# Altium PCB ESP32-PoE_Rev_G1.PcbDoc (part 1 of 3)
Units mm, origin at the board's own origin, x right, y up, seen from the top; angles counter-clockwise.
Board outline 28 x 75 mm, 2 copper layers (F.Cu, B.Cu); 132 components, 123 nets, 484 pads, 212 vias.
Unrouted connection lines stored in the file: 2.
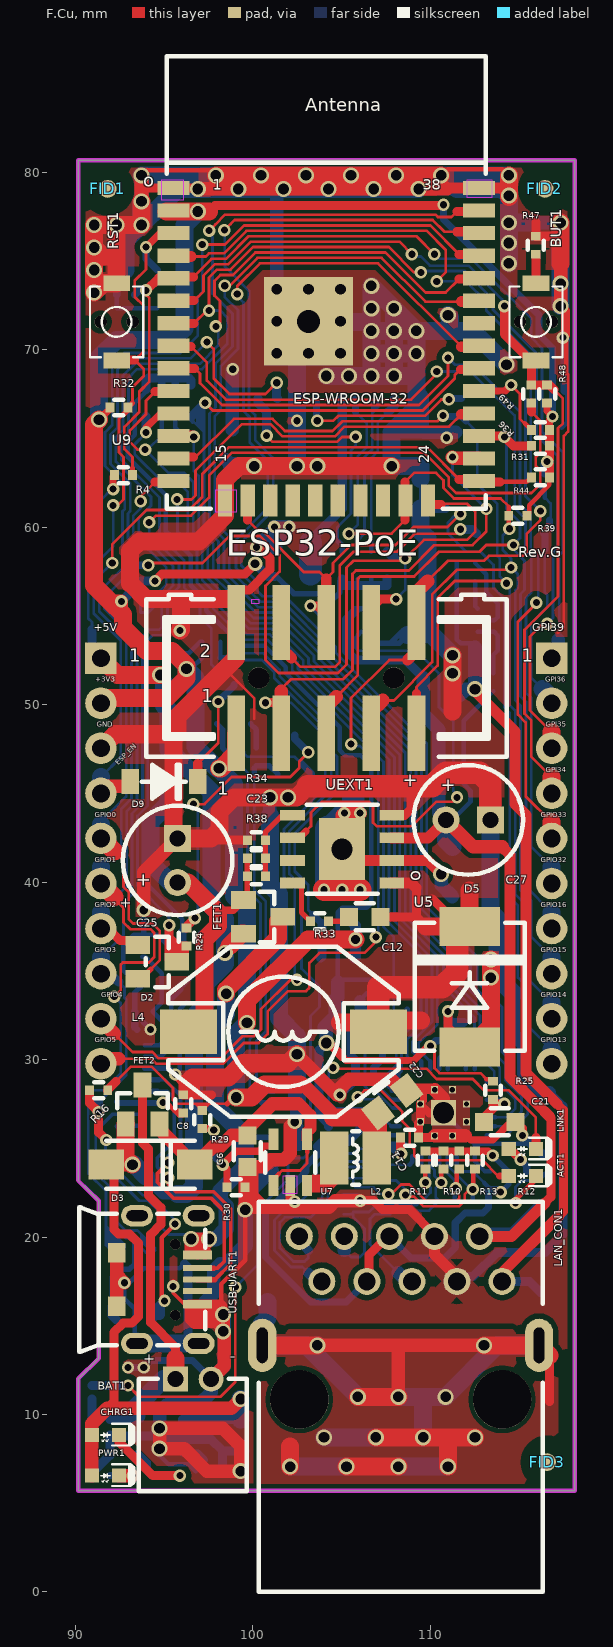
[diagram p0: F.Cu view]
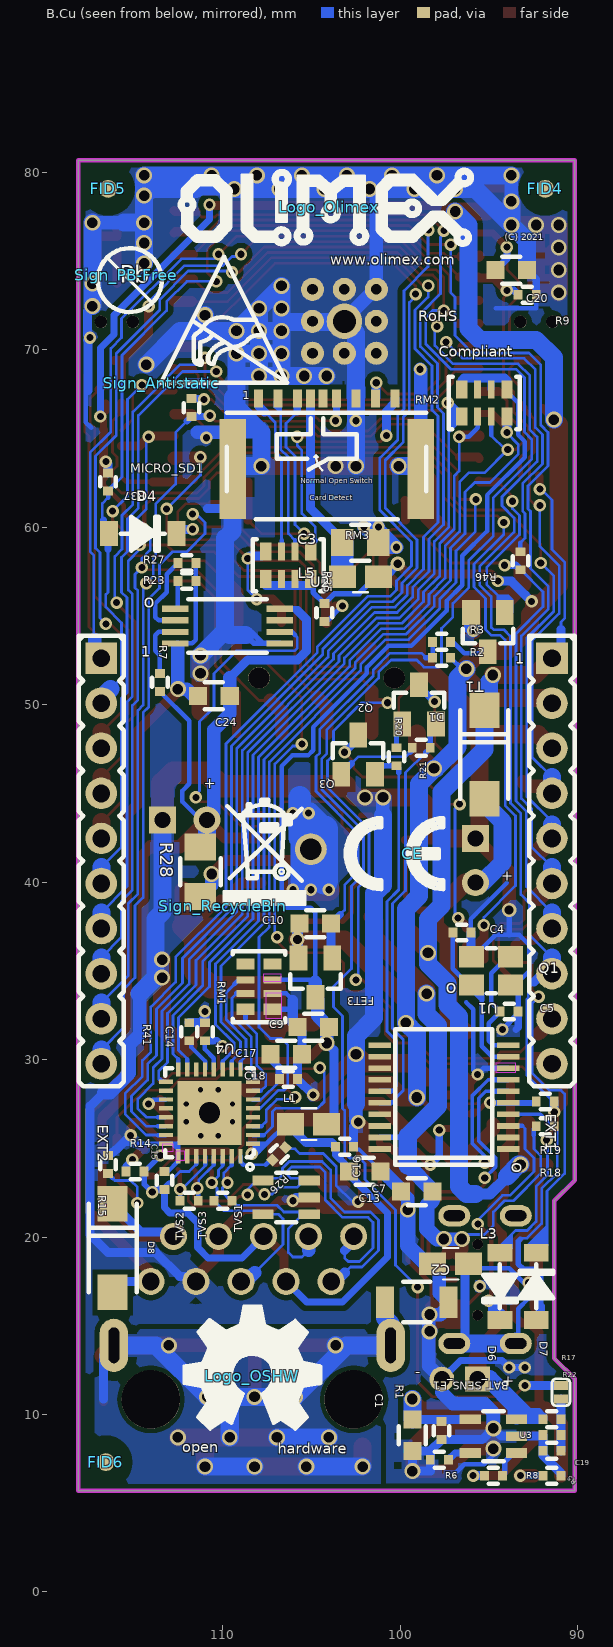
[diagram p1: B.Cu view, seen from below]

## Layer stack, top to bottom
F.Mask: solder mask 0.0102, Solder Resist, Dk 3.5
F.Cu: signal copper 0.0356
Dielectric 1: dielectric 0.32, FR-4, Dk 4.8
B.Cu: signal copper 0.0356
B.Mask: solder mask 0.0102, Solder Resist, Dk 3.5

## Board outline
118.15,80.696 90.15,80.696 90.15,23.192 91.313,22.049 91.313,13.159 90.15,12.016 90.15,5.696 118.15,5.696 118.15,80.696

## Design rules (kind name [scope] priority, off if disabled: settings)
Clearance "Clearence 1,016_PadClass" [InPadClass('Pad Class Clearance 1,016')] p1: gap=1.016 ignorepadtopadclearanceinfootprint=FALSE
Clearance "Clearence 0,3048_Polygon" [InNamedPolygon('B.Cu-GND') OR InNamedPolygon('F.Cu-GND')] p2: gap=0.305 ignorepadtopadclearanceinfootprint=FALSE
Clearance "Clearence 0,254_Polygon" [InNamedPolygon('F.Cu-Net-(C2-Pad2)') OR InNamedPolygon('B.Cu-Net-(C2-Pad2)') OR InNamedPolygon('F.Cu-Net-(C12-Pad1)') OR InNamedPolygon('B.Cu-Net-(R28-Pad1)')] p3: gap=0.254 ignorepadtopadclearanceinfootprint=FALSE
Clearance "Clearence 0,1524_NetClass" [InNetClass('Default')] p4: gap=0.152 ignorepadtopadclearanceinfootprint=FALSE
Clearance "Clearence 0,127_PadClass" [InPadClass('Pad Class Clearance 0,127')] p5: gap=0.127 ignorepadtopadclearanceinfootprint=FALSE
Clearance "Clearence 0,0508_PadClass" [InPadClass('Pad Class Clearance 0,0508')] p6: gap=0.051 ignorepadtopadclearanceinfootprint=FALSE
HoleSize "Hole Size (Default)" [All] p1: absolutevalues=TRUE maxlimit=10 minlimit=0.4 maxpercent=80.000 minpercent=20.000
MinimumSolderMaskSliver [All] p1: minsoldermaskwidth=0
PolygonConnect Polygon_B.Cu-Net-(R28-Pad1)_ConnectDirect [IsNamedPolygon('B.Cu-Net-(R28-Pad1)') vs IsVia] p1: connectstyle=Direct reliefconductorwidth=0.254 reliefentries=4 polygonreliefangle="90 Angle" airgapwidth=0.254
PolygonConnect Polygon_B.Cu-Net-(R28-Pad1)_ConnectRelief45 [IsNamedPolygon('B.Cu-Net-(R28-Pad1)') vs (IsThruPin or IsSMTPin) and (PadShape_AllLayers = 'Round')] p2: connectstyle=Relief reliefconductorwidth=0.508 reliefentries=4 polygonreliefangle="45 Angle" airgapwidth=0.508
PolygonConnect Polygon_B.Cu-Net-(R28-Pad1)_ConnectRelief90 [IsNamedPolygon('B.Cu-Net-(R28-Pad1)') vs (IsThruPin or IsSMTPin) and (PadShape_AllLayers <> 'Round')] p3: connectstyle=Relief reliefconductorwidth=0.508 reliefentries=4 polygonreliefangle="90 Angle" airgapwidth=0.508
PolygonConnect Polygon_F.Cu-Net-(C12-Pad1)_ConnectDirect [IsNamedPolygon('F.Cu-Net-(C12-Pad1)') vs IsVia] p4: connectstyle=Direct reliefconductorwidth=0.254 reliefentries=4 polygonreliefangle="90 Angle" airgapwidth=0.254
PolygonConnect Polygon_F.Cu-Net-(C12-Pad1)_ConnectRelief45 [IsNamedPolygon('F.Cu-Net-(C12-Pad1)') vs (IsThruPin or IsSMTPin) and (PadShape_AllLayers = 'Round')] p5: connectstyle=Relief reliefconductorwidth=0.508 reliefentries=4 polygonreliefangle="45 Angle" airgapwidth=0.508
PolygonConnect Polygon_F.Cu-Net-(C12-Pad1)_ConnectRelief90 [IsNamedPolygon('F.Cu-Net-(C12-Pad1)') vs (IsThruPin or IsSMTPin) and (PadShape_AllLayers <> 'Round')] p6: connectstyle=Relief reliefconductorwidth=0.508 reliefentries=4 polygonreliefangle="90 Angle" airgapwidth=0.508
PolygonConnect Polygon_B.Cu-Net-(C2-Pad2)_ConnectDirect [IsNamedPolygon('B.Cu-Net-(C2-Pad2)') vs IsVia] p7: connectstyle=Direct reliefconductorwidth=0.254 reliefentries=4 polygonreliefangle="90 Angle" airgapwidth=0.254
PolygonConnect Polygon_B.Cu-Net-(C2-Pad2)_ConnectRelief45 [IsNamedPolygon('B.Cu-Net-(C2-Pad2)') vs (IsThruPin or IsSMTPin) and (PadShape_AllLayers = 'Round')] p8: connectstyle=Relief reliefconductorwidth=1.27 reliefentries=4 polygonreliefangle="45 Angle" airgapwidth=0.508
PolygonConnect Polygon_B.Cu-Net-(C2-Pad2)_ConnectRelief90 [IsNamedPolygon('B.Cu-Net-(C2-Pad2)') vs (IsThruPin or IsSMTPin) and (PadShape_AllLayers <> 'Round')] p9: connectstyle=Relief reliefconductorwidth=1.27 reliefentries=4 polygonreliefangle="90 Angle" airgapwidth=0.508
PolygonConnect Polygon_F.Cu-Net-(C2-Pad2)_ConnectDirect [IsNamedPolygon('F.Cu-Net-(C2-Pad2)') vs IsVia] p10: connectstyle=Direct reliefconductorwidth=0.254 reliefentries=4 polygonreliefangle="90 Angle" airgapwidth=0.254
PolygonConnect Polygon_F.Cu-Net-(C2-Pad2)_ConnectRelief45 [IsNamedPolygon('F.Cu-Net-(C2-Pad2)') vs (IsThruPin or IsSMTPin) and (PadShape_AllLayers = 'Round')] p11: connectstyle=Relief reliefconductorwidth=1.27 reliefentries=4 polygonreliefangle="45 Angle" airgapwidth=0.508
PolygonConnect Polygon_F.Cu-Net-(C2-Pad2)_ConnectRelief90 [IsNamedPolygon('F.Cu-Net-(C2-Pad2)') vs (IsThruPin or IsSMTPin) and (PadShape_AllLayers <> 'Round')] p12: connectstyle=Relief reliefconductorwidth=1.27 reliefentries=4 polygonreliefangle="90 Angle" airgapwidth=0.508
PolygonConnect Polygon_F.Cu-GND_ConnectDirect [IsNamedPolygon('F.Cu-GND') vs IsVia] p13: connectstyle=Direct reliefconductorwidth=0.254 reliefentries=4 polygonreliefangle="90 Angle" airgapwidth=0.254
PolygonConnect Polygon_F.Cu-GND_ConnectRelief45 [IsNamedPolygon('F.Cu-GND') vs (IsThruPin or IsSMTPin) and (PadShape_AllLayers = 'Round')] p14: connectstyle=Relief reliefconductorwidth=1.27 reliefentries=4 polygonreliefangle="45 Angle" airgapwidth=0.508
PolygonConnect Polygon_F.Cu-GND_ConnectRelief90 [IsNamedPolygon('F.Cu-GND') vs (IsThruPin or IsSMTPin) and (PadShape_AllLayers <> 'Round')] p15: connectstyle=Relief reliefconductorwidth=1.27 reliefentries=4 polygonreliefangle="90 Angle" airgapwidth=0.508
PolygonConnect Polygon_B.Cu-GND_ConnectDirect [IsNamedPolygon('B.Cu-GND') vs IsVia] p16: connectstyle=Direct reliefconductorwidth=0.254 reliefentries=4 polygonreliefangle="90 Angle" airgapwidth=0.254
PolygonConnect Polygon_B.Cu-GND_ConnectRelief45 [IsNamedPolygon('B.Cu-GND') vs (IsThruPin or IsSMTPin) and (PadShape_AllLayers = 'Round')] p17: connectstyle=Relief reliefconductorwidth=1.27 reliefentries=4 polygonreliefangle="45 Angle" airgapwidth=0.508
PolygonConnect Polygon_B.Cu-GND_ConnectRelief90 [IsNamedPolygon('B.Cu-GND') vs (IsThruPin or IsSMTPin) and (PadShape_AllLayers <> 'Round')] p18: connectstyle=Relief reliefconductorwidth=1.27 reliefentries=4 polygonreliefangle="90 Angle" airgapwidth=0.508
RoutingVias [All] p1: holewidth=0.711 width=1.27 viastyle="Through Hole" minholewidth=0.711 minwidth=1.27 maxholewidth=0.711 maxwidth=1.27
SilkToSilkClearance [All] p1: silktosilkclearance=0
SilkToSolderMaskClearance [IsPad] p1: minsilkscreentomaskgap=0 clearancetoexposedcopper=TRUE
SolderMaskExpansion [All] p1: expansion=0.102 istentingtop=FALSE
Width [All] p1: maxlimit=10 minlimit=0.152 preferedwidth=0.152 minimp=50.000000 maximp=50.000000 favimp=50.000000
26 further rules are at their usual default settings.

## Classes and differential pairs
pad class "Pad Class Clearance 0,127": MICRO_SD1-CH1
pad class "Pad Class Clearance 1,016": FID1-Fid1 FID2-Fid1 FID3-Fid1 FID4-Fid1 FID5-Fid1 FID6-Fid1
pad class "Pad Class Clearance 0,0508": BAT_SENS_E1-1 BAT_SENS_E1-2 C1-1 C1-2 C6-1 C6-2 C7-1 C7-2 C9-1 C9-2 C10-1 C10-2 C12-1 C12-2 C13-1 C13-2 C17-1 C17-2 C20-1 C20-2 C21-1 C21-2 C24-1 C24-2 D4-1 D4-2 D6-1 D6-2 D7-1 D7-2 D9-1 D9-2 FET1-1 FET1-2 FET1-3 FET2-1 FET2-2 FET2-3 FET3-1 FET3-2 FET3-3 L1-1 L1-2 L2-1 L2-2 L3-1 L3-2 L5-1 L5-2 MICRO_SD1-1 MICRO_SD1-2 MICRO_SD1-3 MICRO_SD1-4 MICRO_SD1-5 MICRO_SD1-6 MICRO_SD1-7 MICRO_SD1-8 MICRO_SD1-CD1 MICRO_SD1-CH1 Q2-1 Q2-2 Q2-3 Q3-1 Q3-2 Q3-3 RM1-1.1 RM1-1.2 RM1-2.1 RM1-2.2 RM1-3.1 RM1-3.2 RM1-4.1 RM1-4.2 RM2-1.1 RM2-1.2 RM2-2.1 RM2-2.2 RM2-3.1 RM2-3.2 RM2-4.1 RM2-4.2 RM3-1.1 RM3-1.2 RM3-2.1 RM3-2.2 RM3-3.1 RM3-3.2 RM3-4.1 RM3-4.2 T1-1 T1-2 T1-3 TVS1-1 TVS1-2 TVS1-3 TVS1-4 TVS1-5 U2-1 U2-2 U2-3 U2-4 U2-5 U2-6 U2-7 U2-8 U3-1 U3-2 U3-3 U3-4 U3-5 U5-1 U5-2 U5-3 U5-4 U5-5 U5-6 U5-7 U5-8 U5-9 U7-1 U7-2 U7-3 U7-4 U7-5
net class Default: +3.3VLAN +3V3 +5V +5V_USB +5VP D_Com ESP_EN GND GPI34\BUT1 GPI35 GPI36\U1RXD GPI39 GPIO0 GPIO1\U0TXD GPIO2\HS2_DATA0 GPIO3\U0RXD GPIO4\U1TXD GPIO5\SPI_CS GPIO12\PHY_PWR GPIO13\I2C-SDA GPIO14\HS2_CLK GPIO15\HS2_CMD GPIO16\I2C-SCL GPIO17\EMAC_CLK_OUT_180 GPIO18\MDIO(RMII) GPIO19\EMAC_TXD0(RMII) GPIO21\EMAC_TX_EN(RMII) GPIO22\EMAC_TXD1(RMII) GPIO23\MDC(RMII) GPIO25\EMAC_RXD0(RMII) GPIO26\EMAC_RXD1(RMII) GPIO27\EMAC_RX_CRS_DV GPIO32 GPIO33 Net-(ACT1-Pad1) Net-(ACT1-Pad2) Net-(BAT1-Pad1) Net-(BAT_SENS_E1-Pad2) Net-(BUT1-Pad2) Net-(C2-Pad2) Net-(C3-Pad1) Net-(C4-Pad1) Net-(C5-Pad1) Net-(C6-Pad1) Net-(C8-Pad1) Net-(C10-Pad2) Net-(C11-Pad1) Net-(C12-Pad1) Net-(C12-Pad2) Net-(C17-Pad1) Net-(C21-Pad2) Net-(C23-Pad2) Net-(CHRG1-Pad1) Net-(D4-Pad1) Net-(D6-Pad1) Net-(D7-Pad2) Net-(D9-Pad1) Net-(FID1-PadFid1) Net-(FID2-PadFid1) Net-(FID3-PadFid1) Net-(FID4-PadFid1) Net-(FID5-PadFid1) Net-(FID6-PadFid1) Net-(L2-Pad1) Net-(L3-Pad1) Net-(LNK1-Pad1) Net-(LNK1-Pad2) Net-(MICRO_SD1-Pad1) Net-(MICRO_SD1-Pad2) Net-(MICRO_SD1-Pad5) Net-(MICRO_SD1-Pad7) Net-(MICRO_SD1-Pad8) Net-(MICRO_SD1-PadCD1) Net-(PWR1-Pad1) Net-(Q2-Pad1) Net-(Q2-Pad2) Net-(Q3-Pad1) Net-(Q3-Pad2) Net-(Q3-Pad3) Net-(R3-Pad2) Net-(R6-Pad1) Net-(R7-Pad2) Net-(R8-Pad2) Net-(R23-Pad1) Net-(R26-Pad1) Net-(R27-Pad2) Net-(R28-Pad1) Net-(R29-Pad1) Net-(R33-Pad1) Net-(R41-Pad2) Net-(RM1-Pad1.2) Net-(RM1-Pad2.2) Net-(RM1-Pad3.2) Net-(U1-Pad6) Net-(U1-Pad7) Net-(U1-Pad11) Net-(U1-Pad12) Net-(U1-Pad13) Net-(U1-Pad14) Net-(U1-Pad17) Net-(U1-Pad20) Net-(U2-Pad6) Net-(U2-Pad7) Net-(U4-Pad4) Net-(U4-Pad14) Net-(U4-Pad18) Net-(U4-Pad20) Net-(U4-Pad26) Net-(U5-Pad7) Net-(U9-Pad17) Net-(U9-Pad18) Net-(U9-Pad19) Net-(U9-Pad20) Net-(U9-Pad21) Net-(U9-Pad22) Net-(U9-Pad32) Net-(USB-UART1-Pad4) RD+ RD- Spare1 Spare2 TD+ TD-

## Components (designator, comment, footprint, x,y, rotation, side; value= is the part's Value field where it differs from the comment)
ACT1 "LED/YELLOW/0603" LED_0603_KA 115.189,23.446 r180 top
BAT1 "DW02R" LIPO_BAT-CON2DW02R 96.647,8.841 r0 top
BAT_SENS_E1 "Opened" SJ_1_SMALLER 90.932,11.254 r90 bottom
BUT1 "IT1185AU2" IT1185AU2_V2 115.959,71.579 r90 top
C1 "22uF/6.3V/20%/X5R/C0603" C_0603_5MIL_DWS#1 99.314,8.841 r90 bottom
C2 "1nF/2000V/10%/X7R/C1206" C_1206_5MIL_DWS_ISO 99.06,16.334 r180 bottom
C3 "47uF/6.3V/20%/X5R/C0805" C_0805_5MIL_DWS#1 102.235,59.133 r0 bottom
C4 "27pF/50V/5%/C0G/C0402" C_0402_5MIL_DWS#1 96.52,37.162 r0 bottom
C5 "27pF/50V/5%/C0G/C0402" C_0402_5MIL_DWS#1 93.853,32.717 r0 bottom
C6 "22uF/6.3V/20%/X5R/C0603" C_0603_5MIL_DWS#2 99.695,24.843 r270 top
C7 "22uF/6.3V/20%/X5R/C0603" C_0603_5MIL_DWS#1 99.06,22.557 r180 bottom
C8 "100nF/16V/10%/X7R/C0402" C_0402_5MIL_DWS#2 96.075,27.51 r90 top
C9 "22uF/6.3V/20%/X5R/C0603" C_0603_5MIL_DWS#1 104.902,31.828 r180 bottom
C10 "22uF/6.3V/20%/X5R/C0603" C_0603_5MIL_DWS#1 104.775,37.67 r0 bottom
C11 "100nF/16V/10%/X7R/C0402" C_0402_5MIL_DWS#2 108.839,25.605 r0 top
C12 "100nF/100V/10%/X7R/C0603" C_0603_5MIL_DWS#2 106.299,38.051 r180 top
C13 "22uF/6.3V/20%/X5R/C0603" C_0603_5MIL_DWS#1 101.981,23.7 r0 bottom
C14 "100nF/16V/10%/X7R/C0402" C_0402_5MIL_DWS#1 110.998,31.574 r270 bottom
C15 "100nF/16V/10%/X7R/C0402" C_0402_5MIL_DWS#1 113.284,23.192 r270 bottom
C16 "100nF/16V/10%/X7R/C0402" C_0402_5MIL_DWS#1 103.124,25.097 r0 bottom
C17 "2.2uF/6.3V/10%/X5R/C0603" C_0603_5MIL_DWS#1 106.426,30.304 r0 bottom
C18 "100nF/16V/10%/X7R/C0402" C_0402_5MIL_DWS#1 106.299,28.907 r0 bottom
C19 "1nF/50V/10%/X7R/C0402" C_0402_5MIL_DWS#1 91.44,7.952 r180 bottom
C20 "1uF/10V/20%/X5R/C0603" C_0603_5MIL_DWS#1 93.726,74.5 r0 bottom
C21 "NA(10uF/6.3V/20%/X5R/C0603)" C_0603_5MIL_DWS#2 113.919,26.494 r180 top
C22 "47uF/6.3V/20%/X5R/C0805" C_0805_5MIL_DWS#2 107.862,27.628 r38 top
C23 "12pF/50V/5%/COG/C0402" C_0402_5MIL_DWS#2 100.203,41.353 r0 top
C24 "100nF/100V/10%/X7R/C0603" C_0603_5MIL_DWS#1 110.49,50.497 r180 bottom
C25 "470uF/10V/20%/Low_ESR/RM2.5/6.0x11mm" CPOL-RM2.5mm_6.3x11mm_PTH 95.758,41.226 r90 top
C27 "15uF/100V/20%/RM2.5/6.3x11mm(Farnell:1281844)" CPOL-RM2.5mm_6.3x11mm_PTH 112.141,43.512 r0 top
CE "CE_Sign" CE_Sign 99.314,41.607 r0 bottom
CHRG1 "LED/YELLOW/0603" LED_0603_KA 91.694,8.841 r180 top
D1 "1N5822/SS34/SMA" SMA-KA#1 95.25,47.195 r90 bottom
D2 "BAT54C(SOT23-3)" SOT23-3 94.615,35.511 r180 top
D3 "1N5822/SS34/SMA" SMA-KA#2 94.234,24.081 r180 top
D4 "1N5819S4(SOD-123)" SOD-123_1C-2A_KA#1 114.5,59.651 r180 bottom
D5 "SS510/100V/5A/0.85V/DO214AB(SMC)" DO214AB(SMC)_1(K)-2(A) 112.217,34.114 r270 top
D6 "1N5819S4(SOD-123)" SOD-123_1C-2A_KA#1 94.361,17.223 r270 bottom
D7 "1N5819S4(SOD-123)" SOD-123_1C-2A_KA#1 92.329,17.223 r90 bottom
D8 "SMAJ58A/SMA" SMA-KA#1 116.205,19.382 r90 bottom
D9 "1N5819S4(SOD-123)" SOD-123_1C-2A_KA#2 94.996,45.671 r180 top
EXT1 "NS(HN1x10)" HN1x10 91.44,41.196 r90 bottom
EXT2 "NS(HN1x10)" HN1x10 116.84,41.196 r90 bottom
FET1 "WPM2015-3/TR" SOT23#1 100.584,38.051 r180 top
FET2 "WPM2015-3/TR" SOT23#1 93.789,27.474 r270 top
FET3 "WPM2015-3/TR" SOT23#2 104.775,34.622 r270 bottom
FID1 "Fiducial" Fiducial1x3 91.821,79.072 r270 top
FID2 "Fiducial" Fiducial1x3 116.459,79.072 r270 top
FID3 "Fiducial" Fiducial1x3 116.586,7.317 r270 top
FID4 "Fiducial" Fiducial1x3 91.821,79.072 r90 bottom
FID5 "Fiducial" Fiducial1x3 116.459,79.072 r90 bottom
FID6 "Fiducial" Fiducial1x3 116.586,7.317 r90 bottom
L1 "FB0805/600R/2A" L_0805_5MIL_DWS 105.156,26.367 r180 bottom
L2 "2.2uH/1.5A/DCR=72mR/20%/3.00x3.00x1.50mm/CD32(NR3015T2R2M)" CD32 105.791,24.462 r0 top
L3 "FB0805/600R/2A" L_0805_5MIL_DWS 97.155,18.493 r180 bottom
L4 "33uH/2.1A/DCR=0.1R/20%/DBS135(PD3316MT330)" DBS135 101.727,31.574 r180 top
L5 "FB0805/600R/2A" L_0805_5MIL_DWS 102.235,57.228 r180 bottom
LAN_CON1 "RJP-003TC1(LPJ4112CNL)" RJP-003TC1(LPJ4112CNL) 108.331,11 r0 top
LNK1 "LED/GREEN/0603" LED_0603_KA 115.189,24.97 r180 top
Logo_Olimex "" OLIMEX_LOGO_TB 104.013,78.056 r0 bottom
Logo_OSHW "" LOGO_OPENHARDWARE_8x8 108.331,12.143 r0 bottom
MICRO_SD1 "TFC-9P-1.7H(ATFFS150A01BR016)" uSD(TFC-9P-1.xH(ATFFS150A01BR016)) 104.14,63.959 r180 bottom
PWR1 "LED/RED/0603" LED_0603_KA 91.694,6.555 r180 top
Q1 "Q12MHz/20pF/10ppm/4P/3.2x2.5mm" TSX-3.2x2.5mm_GND(3) 94.869,35.003 r0 bottom
Q2 "BC817-40(SOT23)" SOT23#2 98.93,50.03 r90 bottom
Q3 "BC817-40(SOT23)" SOT23#2 102.362,47.195 r90 bottom
R1 "10k/R0402" R_0402_5MIL_DWS#1 97.663,9.095 r90 bottom
R2 "10k/R0402" R_0402_5MIL_DWS#1 97.663,52.656 r180 bottom
R3 "1k/R0402" R_0402_5MIL_DWS#1 97.663,53.545 r0 bottom
R4 "47k/R0402" R_0402_5MIL_DWS#2 92.71,62.943 r0 top
R5 "2.2k/R0402" R_0402_5MIL_DWS#1 91.44,6.555 r0 bottom
R6 "2.2k/R0402" R_0402_5MIL_DWS#1 97.79,7.444 r180 bottom
R7 "24.9k/1%/R0402" R_0402_5MIL_DWS#1 113.538,51.259 r270 bottom
R8 "2.2k/R0402" R_0402_5MIL_DWS#1 94.742,6.555 r0 bottom
R9 "100k/R0402" R_0402_5MIL_DWS#1 92.837,73.103 r0 bottom
R10 "49.9R/1%/R0402" R_0402_5MIL_DWS#2 110.744,24.335 r270 top
R11 "49.9R/1%/R0402" R_0402_5MIL_DWS#2 109.728,24.335 r270 top
R12 "49.9R/1%/R0402" R_0402_5MIL_DWS#2 112.522,24.335 r270 top
R13 "49.9R/1%/R0402" R_0402_5MIL_DWS#2 111.633,24.335 r270 top
R14 "2.2k/R0402" R_0402_5MIL_DWS#1 114.935,23.7 r180 bottom
R15 "2.2k/R0402" R_0402_5MIL_DWS#1 116.459,24.081 r270 bottom
R16 "NA(10k/R0402)" R_0402_5MIL_DWS#2 91.313,28.272 r0 top
R17 "470k/R0402" R_0402_5MIL_DWS#1 91.44,9.73 r0 bottom
R18 "10k/R0402" R_0402_5MIL_DWS#1 91.821,26.24 r0 bottom
R19 "10k/R0402" R_0402_5MIL_DWS#1 91.821,27.637 r0 bottom
R20 "1k/R0402" R_0402_5MIL_DWS#1 100.203,47.068 r270 bottom
R21 "1k/R0402" R_0402_5MIL_DWS#1 98.806,47.576 r180 bottom
R22 "470k/R0402" R_0402_5MIL_DWS#1 91.44,8.841 r180 bottom
R23 "180k/1%/R0402" R_0402_5MIL_DWS#1 112.014,56.974 r0 bottom
R24 "220R/R0402" R_0402_5MIL_DWS#2 96.266,36.908 r270 top
R25 "10k/R0402" R_0402_5MIL_DWS#2 113.538,28.272 r90 top
R26 "12.1k/1%/R0402" R_0402_5MIL_DWS#1 106.829,24.694 r315 bottom
R27 "4.42k/1%/1/16W/R0402" R_0402_5MIL_DWS#1 112.014,57.99 r180 bottom
R28 "0.03R/1%/R1206" R_1206_5MIL_DWS 111.252,40.591 r270 bottom
R29 "220k/R0402" R_0402_5MIL_DWS#2 97.155,26.621 r90 top
R30 "49.9k/1%/R0402" R_0402_5MIL_DWS#2 99.06,22.811 r0 top
R31 "2.2k/R0402" R_0402_5MIL_DWS#2 116.205,64.594 r180 top
R32 "10k/R0402" R_0402_5MIL_DWS#2 92.456,66.753 r0 top
R33 "4.7R/R0402" R_0402_5MIL_DWS#2 103.759,37.797 r0 top
R34 "5.23k/1%/R0402" R_0402_5MIL_DWS#2 100.203,42.369 r180 top
R35 "2.2k/R0402" R_0402_5MIL_DWS#1 104.267,55.196 r90 bottom
R36 "10k/R0402" R_0402_5MIL_DWS#2 116.205,65.483 r180 top
R37 "10k/R0402" R_0402_5MIL_DWS#1 116.459,62.562 r90 bottom
R38 "30.1k/1%/R0402" R_0402_5MIL_DWS#2 100.203,40.337 r0 top
R39 "10k/R0402" R_0402_5MIL_DWS#2 114.935,60.657 r180 top
R40 "10R/R0402" R_0402_5MIL_DWS#1 111.76,66.753 r270 bottom
R41 "2.2k/R0402" R_0402_5MIL_DWS#1 111.887,31.574 r90 bottom
R44 "NA/R0402" R_0402_5MIL_DWS#2 116.205,62.816 r0 top
R46 "220R/R0402" R_0402_5MIL_DWS#1 93.218,58.117 r270 bottom
R47 "220R/R0402" R_0402_5MIL_DWS#2 115.951,75.897 r90 top
R48 "10k/R0402" R_0402_5MIL_DWS#2 116.586,67.515 r90 top
R49 "NA/R0402" R_0402_5MIL_DWS#2 115.697,67.515 r270 top
RM1 "RA1206_(4X0603)_4B8_2.2k" R_MATRIX_4 107.95,34.114 r270 bottom
RM2 "RA1206_(4X0603)_4B8_2.2k" R_MATRIX_4 95.25,67.007 r180 bottom
RM3 "RA1206_(4X0603)_4B8_2.2k" R_MATRIX_4 106.299,57.863 r180 bottom
RST1 "IT1185AU2" IT1185AU2_V2 92.321,71.579 r90 top
Sign_Antistatic "Val**" LOGO_ANTISTATIC_1 113.474,68.15 r0 bottom
Sign_PB-Free "" LOGO_PBFREE 115.443,74.246 r180 bottom
Sign_RecycleBin "" LOGO_RECYCLEBIN_1 109.982,38.686 r0 bottom
T1 "LMUN2211LT1G(SOT-23)" SOT23#2 95.057,54.089 r270 bottom
TVS1 "ESDS314DBVR(SOT-23-5)" SOT-23-5#1 106.426,22.237 r0 bottom
TVS2 "NA(GG0402052R542P)" D_0402_5MIL_DWS 111.887,22.049 r0 bottom
TVS3 "NA(GG0402052R542P)" D_0402_5MIL_DWS 109.982,22.049 r180 bottom
U1 "CH340T(SSOP20W)" SSOP-20W 97.536,27.891 r270 bottom
U2 "TPS2375PW(TSSOP-8)" TSSOP-8_Pitch-0.65mm_Dimensions-4.40x3.00x1.20mm 109.728,54.434 r0 bottom
U3 "BL4054B-42TPRN(SOT23-5)" SOT-23-5#1 94.742,8.778 r0 bottom
U4 "LAN8710A-EZC(QFN32)" QFN32_EP(33)_5.00x5.00x0.90mm_Pitch_0.50mm 110.744,27.002 r270 bottom
U5 "TX4138(ESOIC-8)" ESOIC-8 105.029,41.861 r90 top
U7 "SY8089AAAC(SOT23-5)" SOT-23-5#2 102.108,24.208 r270 top
U9 "ESP-WROOM-32" ESP-WROOM-32_MODULE 104.14,73.811 r0 top
UEXT1 "P-B-V-10-LF" GBH-254-SMT-10 104.14,51.513 r0 top
USB-UART1 "MISB-SWMM-5B-LF(USB_MICRO)" USB-MICRO_MISB-SWMM-5B_LF 93.726,17.604 r180 top

## Footprints (in the part's own frame and the unit in brackets; to place one, negate y for a bottom-side part, rotate by r counter-clockwise, add the part's x,y. Pads: shape width x height; smd on the part's side, far side on the other; paste and mask are expansions set on the pad)
C_0402_5MIL_DWS#1 [mm]
  rect 0.5x0.55 smd mask+0.051: 1(0.508,0) 2(-0.508,0)
  silkscreen extent -0.25,-0.44 0.25,0.44
C_0402_5MIL_DWS#2 [mm]
  rect 0.5x0.55 smd mask+0.051: 1(-0.508,0) 2(0.508,0)
  silkscreen extent -0.25,-0.44 0.25,0.44
C_0603_5MIL_DWS#1 [mil]
  rect 40x40 smd mask+2: 1(35,0) 2(-35,0)
  silkscreen extent -20,-30 20,30
C_0603_5MIL_DWS#2 [mil]
  rect 40x40 smd mask+2: 1(-35,0) 2(35,0)
  silkscreen extent -20,-30 20,30
C_0805_5MIL_DWS#1 [mil]
  rect 50x60 smd mask+2: 1(40,0) 2(-40,0)
  silkscreen extent -20,-40 20,40
C_0805_5MIL_DWS#2 [mil]
  rect 50x60 smd mask+2: 1(-40,0) 2(40,0)
  silkscreen extent -20,-40 20,40
C_1206_5MIL_DWS_ISO [mil]
  rect 40x70 smd mask+2: 1(70,0) 2(-70,0)
  silkscreen extent -30,-45 30,45
CD32 [mm]
  rect 1.6x3 smd mask+0.051: 1(-1.2,0) 2(1.2,0)
  silkscreen extent -0.2,-1.5 0.2,1.5
CE_Sign [mm]
  silkscreen extent -1.75,-2 3.75,2
CPOL-RM2.5mm_6.3x11mm_PTH [mm]
  round 1.524 hole 0.9 paste-1.524 mask+0.051: 1(-1.25,0)
  rect 1.524x1.524 hole 0.9 paste-1.524 mask+0.051: 2(1.25,0)
  silkscreen extent -3.09,-3.09 3.09,3.09
D_0402_5MIL_DWS [mm]
  rect 0.5x0.55 smd mask+0.051: 1(0.508,0) 2(-0.508,0)
  silkscreen extent -0.25,-0.44 0.25,0.44
DBS135 [mm]
  rect 3.2x2.5 smd paste+0.1 mask+0.051: 1(-5.35,0) 2(5.35,0)
  silkscreen extent -6.5,-4.8 6.5,4.8
DO214AB(SMC)_1(K)-2(A) [mm]
  rect 2.2x3.4 smd paste+0.1 mask+0.051: 1(-3.4,0) 2(3.4,0)
  silkscreen extent -3.6,-3.1 3.6,3.1
ESOIC-8 [mm]
  rect 0.6x1.4 smd mask+0.051: 1(-1.905,-2.8) 2(-0.635,-2.8) 3(0.635,-2.8) 4(1.905,-2.8) 5(1.905,2.8) 6(0.635,2.8) 7(-0.635,2.8) 8(-1.905,2.8)
  round 1.8 hole 1.2 paste-1.8 mask+0.051: 9(0,0)
  rect 3.5x2.6 smd mask+0.051: 9(0,0)
  silkscreen extent -2.5,-2 2.5,2
ESP-WROOM-32_MODULE [mm]
  rect 1.8x0.8 smd paste+0.051 mask+0.051: 1(-8.6,5.31) 2(-8.6,4.04) 3(-8.6,2.77) 4(-8.6,1.5) 5(-8.6,0.23) 6(-8.6,-1.04) 7(-8.6,-2.31) 8(-8.6,-3.58) 9(-8.6,-4.85) 10(-8.6,-6.12) 11(-8.6,-7.39) 12(-8.6,-8.66) 13(-8.6,-9.93) 14(-8.6,-11.2) 25(8.6,-11.2) 26(8.6,-9.93) 27(8.6,-8.66) 28(8.6,-7.39) 29(8.6,-6.12) 30(8.6,-4.85) 31(8.6,-3.58) 32(8.6,-2.31) 33(8.6,-1.04) 34(8.6,0.23) 35(8.6,1.5) 36(8.6,2.77) 37(8.6,4.04) 38(8.6,5.31)
  rect 0.8x1.8 smd paste+0.051 mask+0.051: 15(-5.7,-12.3) 16(-4.43,-12.3) 17(-3.16,-12.3) 18(-1.89,-12.3) 19(-0.62,-12.3) 20(0.65,-12.3) 21(1.92,-12.3) 22(3.19,-12.3) 23(4.46,-12.3) 24(5.73,-12.3)
  round 1.3 hole 0.6 paste-1.3 mask-1.3: 39(-2.8,-4) 39(-2.8,-2.2) 39(-2.8,-0.4) 39(-1,-4) 39(-1,-0.4) 39(0.8,-4) 39(0.8,-2.2) 39(0.8,-0.4)
  round 2 hole 1.3 paste-2 mask+0.051: 39(-1,-2.2)
  rect 5x5 smd paste-5 mask+0.051: 39(-1,-2.2)
  rect 1.2x1.8 on Top Paste mask-1.8: Past(-1.9,-3.7) Past(-1.9,-0.7) Past(-0.1,-3.7) Past(-0.1,-0.7)
  silkscreen extent -9,-12.75 9,12.75
Fiducial1x3 [mm]
  round 1 smd paste-1 mask+0.127: Fid1(0,0)
GBH-254-SMT-10 [mm]
  rect 1x4.25 smd paste-4.25 mask+0.051: 1(-5.08,-3.125) 2(-5.08,3.125) 3(-2.54,-3.125) 4(-2.54,3.125) 5(0,-3.125) 6(0,3.125) 7(2.54,-3.125) 8(2.54,3.125) 9(5.08,-3.125) 10(5.08,3.125)
  rect 1.7x4.55 on Top Paste paste+0.127 mask-4.55: past(-5.08,-3.125) past(-5.08,3.125) past(-2.54,-3.125) past(-2.54,3.125) past(0,-3.125) past(0,3.125) past(2.54,-3.125) past(2.54,3.125) past(5.08,-3.125) past(5.08,3.125)
  round 1.2 hole 1.2 paste-1.2 mask+0.051: Un1(3.81,0) Un2(-3.81,0)
  silkscreen extent -10.16,-4.44 10.16,4.7
HN1x10 [mil]
  rect 70x70 hole 39.37 paste-70 mask+2: 1(450,0)
  round 70 hole 39.37 paste-70 mask+2: 2(350,0) 3(250,0) 4(150,0) 5(50,0) 6(-50,0) 7(-150,0) 8(-250,0) 9(-350,0) 10(-450,0)
  silkscreen extent -500,-50 500,50
IT1185AU2_V2 [mm]
  rect 0.9x1.5 smd paste-1.5 mask+0.051: 1(-2.177,0) 2(2.177,0)
  rect 1.327x1.754 on Top Paste mask-1.754: cream(-2.39,0) cream(2.39,0)
  round 0.7 hole 0.7 paste-0.7 mask+0.051: Un1(0,0.9) Un2(0,-0.9)
  silkscreen extent -2,-1.5 2,1.5
L_0805_5MIL_DWS [mil]
  rect 60x50 smd mask+2: 1(40,0) 2(-40,0)
  silkscreen extent -16,-35 17,35
LED_0603_KA [mm]
  rect 0.8x0.8 smd mask+0.051: 1(-0.762,0) 2(0.762,0)
  silkscreen extent -1.56,-0.64 0.26,0.58
LIPO_BAT-CON2DW02R [mm]
  rect 1.4x1.4 hole 0.9 paste-1.4 mask+0.051: 1(-1.008,3.152)
  round 1.4 hole 0.9 paste-1.4 mask+0.051: 2(1.003,3.155)
  silkscreen extent -3.07,-3.15 3.01,3.16
LOGO_ANTISTATIC_1 [mm]
  silkscreen extent -7.11,-7.11 0,0
LOGO_OPENHARDWARE_8x8 [mm]
  silkscreen extent -3.89,-3.99 3.87,3
LOGO_PBFREE [mm]
  silkscreen extent -1.6,-2.12 2,1.49
LOGO_RECYCLEBIN_1 [mm]
  silkscreen extent -4.62,-5.97 -0.05,-0.05
OLIMEX_LOGO_TB [mm]
  silkscreen extent -7.99,-2.02 8.33,2.06
QFN32_EP(33)_5.00x5.00x0.90mm_Pitch_0.50mm [mm]
  rect 0.25x0.8 smd paste-0.01 mask+0.051: 1(1.75,2.45) 2(1.25,2.45) 3(0.75,2.45) 4(0.25,2.45) 5(-0.25,2.45) 6(-0.75,2.45) 7(-1.25,2.45) 8(-1.75,2.45) 17(-1.75,-2.45) 18(-1.25,-2.45) 19(-0.75,-2.45) 20(-0.25,-2.45) 21(0.25,-2.45) 22(0.75,-2.45) 23(1.25,-2.45) 24(1.75,-2.45)
  rect 0.8x0.25 smd paste-0.01 mask+0.051: 9(-2.45,1.75) 10(-2.45,1.25) 11(-2.45,0.75) 12(-2.45,0.25) 13(-2.45,-0.25) 14(-2.45,-0.75) 15(-2.45,-1.25) 16(-2.45,-1.75) 25(2.45,-1.75) 26(2.45,-1.25) 27(2.45,-0.75) 28(2.45,-0.25) 29(2.45,0.25) 30(2.45,0.75) 31(2.45,1.25) 32(2.45,1.75)
  rect 0.4x0.4 hole 0.3 paste-0.4 mask-0.4: 33(-1.3,-0.5) 33(-1.3,0.5) 33(-0.5,-1.3) 33(-0.5,1.3) 33(0.5,-1.3) 33(0.5,1.3) 33(1.3,-0.5) 33(1.3,0.5)
  rect 3.6x3.6 smd paste-3.6 mask+0.051: 33(0,0)
  rect 1.422x1.422 hole 1.2 paste-1.422 mask+0.051: 33(0,0)
  silkscreen extent -2.5,-2.5 3.22,2.5
R_0402_5MIL_DWS#1 [mm]
  rect 0.5x0.55 smd mask+0.051: 1(0.508,0) 2(-0.508,0)
  silkscreen extent -0.25,-0.44 0.25,0.44
R_0402_5MIL_DWS#2 [mm]
  rect 0.5x0.55 smd mask+0.051: 1(-0.508,0) 2(0.508,0)
  silkscreen extent -0.25,-0.44 0.25,0.44
R_1206_5MIL_DWS [mil]
  rect 60x70 smd mask+2: 1(55,0) 2(-55,0)
  silkscreen extent -30,-45 30,45
R_MATRIX_4 [mil]
  rect 25x40 smd mask+2: 1.1(50,30) 1.2(50,-30) 4.1(-50,30) 4.2(-50,-30)
  rect 15x40 smd mask+2: 2.1(15,30) 2.2(15,-30) 3.1(-15,30) 3.2(-15,-30)
  silkscreen extent -79,-58 79,58
RJP-003TC1(LPJ4112CNL) [mm]
  rrect100% 1.6x3 hole 2 slot 0.6 at 0 deg paste-3 mask+0.051: 0(-7.8,2.9) 0(7.8,2.9)
  round 1.524 hole 1 paste-1.524 mask+0.051: 1(-5.715,9.04) 2(-4.445,6.5) 3(-3.175,9.04) 4(-1.905,6.5) 5(-0.635,9.04) 6(0.635,6.5) 7(1.905,9.04) 8(3.175,6.5) 9(4.445,9.04) 10(5.715,6.5)
  round 3.3 hole 3.3 paste-3.3 mask+0.051: Un1(-5.715,-0.15) Un2(5.715,-0.15)
  silkscreen extent -8,-11 8,11
SJ_1_SMALLER [mil]
  rect 20x30 smd paste-30 mask+2: 1(15,0) 2(-15,0)
  silkscreen extent -30,-20 30,20
SMA-KA#1 [mm]
  rect 2x1.7 smd mask+0.051: 1(2.5,0) 2(-2.5,0)
  silkscreen extent -2.5,-1.35 2.5,1.35
SMA-KA#2 [mm]
  rect 2x1.7 smd mask+0.051: 1(-2.5,0) 2(2.5,0)
  silkscreen extent -2.5,-1.35 2.5,1.35
SOD-123_1C-2A_KA#1 [mm]
  rect 1x1.4 smd mask+0.051: 1(1.9,0) 2(-1.9,0)
  silkscreen extent -1.24,-0.97 1.23,0.94
SOD-123_1C-2A_KA#2 [mm]
  rect 1x1.4 smd mask+0.051: 1(-1.9,0) 2(1.9,0)
  silkscreen extent -1.23,-0.94 1.24,0.97
SOT23#1 [mm]
  rect 1.4x1 smd mask+0.051: 1(1.107,-0.95) 2(1.107,0.953) 3(-1.102,-0.003)
  silkscreen extent -0.64,-1.42 0.2,1.42
SOT23#2 [mm]
  rect 1.4x1 smd mask+0.051: 1(-1.107,0.95) 2(-1.107,-0.952) 3(1.102,0.003)
  silkscreen extent -0.2,-1.42 0.64,1.42
SOT23-3 [mm]
  rect 1.4x1 smd mask+0.051: 1(1.1,-0.95) 2(1.1,0.95) 3(-1.1,0)
  silkscreen extent -0.66,-1.42 0.66,1.42
SOT-23-5#1 [mm]
  rect 1.2x0.55 smd mask+0.051: 1(-1.3,0.95) 2(-1.3,0) 3(-1.3,-0.95) 4(1.3,-0.95) 5(1.3,0.95)
  silkscreen extent -0.57,-1.4 0.56,1.41
SOT-23-5#2 [mm]
  rect 1.2x0.55 smd mask+0.051: 1(1.3,-0.95) 2(1.3,0) 3(1.3,0.95) 4(-1.3,0.95) 5(-1.3,-0.95)
  silkscreen extent -0.56,-1.41 0.57,1.4
SSOP-20W [mm]
  rect 0.325x1.27 smd mask+0.051: 1(2.925,3.619) 2(2.275,3.619) 3(1.625,3.619) 4(0.975,3.619) 5(0.325,3.619) 6(-0.325,3.619) 7(-0.975,3.619) 8(-1.625,3.619) 9(-2.275,3.62) 10(-2.925,3.62) 11(-2.925,-3.619) 12(-2.275,-3.619) 13(-1.625,-3.619) 14(-0.975,-3.619) 15(-0.325,-3.619) 16(0.325,-3.619) 17(0.975,-3.619) 18(1.625,-3.619) 19(2.275,-3.62) 20(2.925,-3.62)
  silkscreen extent -3.81,-2.73 3.81,2.73
TSSOP-8_Pitch-0.65mm_Dimensions-4.40x3.00x1.20mm [mm]
  rect 1.5x0.35 smd mask+0.051: 1(2.95,-0.975) 2(2.95,-0.325) 3(2.95,0.325) 4(2.95,0.975) 5(-2.95,0.975) 6(-2.95,0.325) 7(-2.95,-0.325) 8(-2.95,-0.975)
  silkscreen extent -2.2,-1.5 2.2,1.5
TSX-3.2x2.5mm_GND(3) [mm]
  rect 1.4x1.2 smd mask+0.051: 1(1.1,0.8) 2(-1.1,-0.8) 3(-1.1,0.8) 3(1.1,-0.8)
  silkscreen extent -0.25,-1.27 0.25,1.27
USB-MICRO_MISB-SWMM-5B_LF [mm]
  rrect100% 1.8x1.2 hole 1.2 slot 0.6 at 90 deg paste-1.8 mask+0.051: 0(-3.22,3.6) 0(-3.22,-3.6) 0(0.25,3.6) 0(0.25,-3.6)
  rect 1x1.1 smd paste+0.127 mask+0.051: 0(1.4,1.5) 0(1.4,-1.5)
  rect 1.65x0.5 smd mask+0.051: 1(-3.15,-1.388) 5(-3.15,1.388)
  rect 1.65x0.325 smd paste+0.036 mask+0.051: 2(-3.15,-0.65) 3(-3.15,0) 4(-3.15,0.65)
  round 0.6 hole 0.6 paste-0.6 mask+0.051: Un1(-1.9,-2) Un2(-1.9,2)
  silkscreen extent -3.6,-4.06 3.5,4.06
uSD(TFC-9P-1.xH(ATFFS150A01BR016)) [mm]
  rect 0.5x1 smd mask+0.051: 1(-3.85,3.3) 2(-2.75,3.3) 3(-1.65,3.3) 4(-0.9,3.3) 5(0.55,3.3) 6(1.65,3.3) 7(2.75,3.3) 8(3.85,3.3) CD1(-0.2,3.3)
  rect 1.5x1.2 smd paste+0.127 mask+0.051: CH1(-5.3,-2.9) CH1(-5.3,1.55) CH1(5.3,-2.9) CH1(5.3,1.55)
  rect 1.5x4.5 smd paste-4.5 mask-4.5: CH1(-5.3,-0.5) CH1(5.3,-0.5)
  silkscreen extent -5.63,-3.5 5.63,2.5

## Part data
ACT1 CHRG1 LNK1 PWR1: library part LED_0603_KA, "CCCCC"
BAT1: library part LIPO_BAT-CON2DW02R
BAT_SENS_E1: library part SJ_1_SMALLER, "SOLDER JUMPER"
BUT1 RST1: library part IT1185AU2_V2
C1 C6 C7 C9 C10 C12 C13 C17 C20 C21 C24: library part C_0603_5MIL_DWS, "Resistor SMD 0603, reflow soldering, Vishay (see dcrcw.pdf)"
C2: library part C_1206_5MIL_DWS_ISO
C3 C22: library part C_0805_5MIL_DWS
C4 C5 C8 C11 C14 C15 C16 C18 C19 C23: library part C_0402_5MIL_DWS
C25 C27: library part CPOL-RM2.5mm_6.3x11mm_PTH
D1 D3 D8: library part SMA-KA
D2: library part SOT23-3, "ROTATED COUNTERCLOCKWISE 90 BY PENKO TO BA AS IS IN THE REAL REEL"
D4 D6 D7 D9: library part SOD-123_1C-2A_KA
D5: library part DO214AB(SMC)_1(K)-2(A)
EXT1 EXT2: library part HN1x10
FET1 FET2 FET3 Q2 Q3 T1: library part SOT23
FID1 FID2 FID3 FID4 FID5 FID6: library part Fiducial1x3
L1 L3 L5: library part L_0805_5MIL_DWS, "Resistor SMD 0805, hand soldering"
L2: library part CD32, "ROTATED COUNTERCLOCKWISE 90"
L4: library part DBS135, "https://store.comet.bg/download-file.php?id=442"
Logo_Olimex: library part OLIMEX_LOGO_TB
Logo_OSHW: library part LOGO_OPENHARDWARE_8x8
MICRO_SD1: library part uSD(TFC-9P-1.xH(ATFFS150A01BR016)), "OFFSET X-> -0.950MM"
Q1: library part TSX-3.2x2.5mm_GND(3)
R1 R2 R3 R4 R5 R6 R7 R8 R9 R10 R11 R12 R13 R14 R15 R16 R17 R18 R19 R20 R21 R22 R23 R24 R25 R26 R27 R29 R30 R31 R32 R33 R34 R35 R36 R37 R38 R39 R40 R41 R44 R46 R47 R48 R49: library part R_0402_5MIL_DWS
R28: library part R_1206_5MIL_DWS
RM1 RM2 RM3: library part R_MATRIX_4
Sign_Antistatic: library part LOGO_ANTISTATIC_1
Sign_PB-Free: library part LOGO_PBFREE
Sign_RecycleBin: library part LOGO_RECYCLEBIN_1
TVS1 U3 U7: library part SOT-23-5
TVS2 TVS3: library part D_0402_5MIL_DWS
U1: library part SSOP-20W, "SSOP 20 pins"
U2: library part TSSOP-8_Pitch-0.65mm_Dimensions-4.40x3.00x1.20mm, "TSSOP-8"
U4: library part QFN32_EP(33)_5.00x5.00x0.90mm_Pitch_0.50mm
U5: library part ESOIC-8, "ESOIC-8"
U9: library part ESP-WROOM-32_MODULE, "A powerful, generic Wi-Fi+BT+BLE MCU module"
UEXT1: library part GBH-254-SMT-10
USB-UART1: library part USB-MICRO_MISB-SWMM-5B_LF

## Via types
v1: diameter 0.7, hole 0.4, F.Cu to B.Cu, tented both sides, 119 vias
v2: diameter 0.9, hole 0.6, F.Cu to B.Cu, tented both sides, 89 vias
v3: diameter 0.8, hole 0.5, F.Cu to B.Cu, tented both sides, 4 vias

## Nets (pads, with @x,y where several pads share a name; then routed paths per layer and width w, separated by ;. In a path a pad name is that pad's centre, name@x,y a point inside that pad or via, vN(x,y) a via of type N, cw(c..) or ccw(c..) an arc to the next point about the centre after c; other vN are vias at no path point)
+3.3VLAN: C9.1 C14.1 FET3.3 L1.1 R25.2 RM1.3.1 RM2.1.1 RM2.2.1 RM2.3.1 RM2.4.1 U4.12 | length 72.8
  F.Cu w0.152: v1(110.007,30.761) 110.233,30.535 110.233,29.519 110.515,29.237 112.827,29.237 113.157,28.907
  F.Cu w0.254: 113.157,28.907 113.411,28.907 R25.2@113.538,28.78
  F.Cu w0.406: 105.029,30.177 105.258,29.948 109.067,29.948 109.88,30.761 v1(110.007,30.761)
  F.Cu w0.508: v2(104.14,30.939) 104.267,30.939 105.029,30.177
  B.Cu w0.254: RM2.1.1@93.98,67.642 93.345,67.007 93.345,65.209 92.964,64.828 92.964,63.954 95.098,61.82 95.098,59.793 96.495,58.396 96.495,56.74 97.384,55.851 97.384,55.308 99.375,53.316 100.665,53.316 101.869,52.112 101.869,51.777 104.902,48.744 104.902,47.431 105.189,47.144 106.07,47.144 106.68,46.535 106.68,38.813 106.426,38.559 105.029,38.559 104.775,38.305 104.775,34.368 104.902,34.495 RM1.3.1@107.188,34.495 ; U4.12@110.494,29.452 110.494,30.079 110.998,30.583 C14.1@110.998,31.066
  B.Cu w0.406: RM2.2.1@94.869,67.769 94.869,68.404 ; RM2.3.1@95.631,67.769 95.631,68.404 ; v1(110.007,30.761) 110.312,31.066 C14.1@110.998,31.066
  B.Cu w0.508: RM2.1.1@93.98,67.769 93.98,68.277 94.107,68.404 94.869,68.404 95.631,68.404 96.393,68.404 96.52,68.277 RM2.4.1@96.52,68.023 ; C9.1@104.013,31.828 C9.1@104.14,31.701 ; v2(104.14,30.939) 103.735,30.534 103.735,26.899 104.267,26.367 L1.1@104.267,26.24 ; FET3.3@104.772,33.52 FET3.3@104.775,33.522
  B.Cu w0.762: C9.1@104.013,31.828 104.648,32.463 104.648,33.395 FET3.3@104.772,33.52 ; v2(104.14,30.939) C9.1@104.14,31.701 ; FET3.3@104.775,33.522 104.775,34.368
+3V3: C10.1 C22.1 EXT1.2 FET3.2 L2.2 L5.1 R2.1 R16.2 R29.2 R31.1 R32.1 R35.1 R36.1 R37.1 R39.1 R44.2 R48.1 RM3.1.2 RM3.2.2 RM3.3.2 RM3.4.2 U9.2 UEXT1.1 | length 162
  F.Cu w0.152: 92.285,28.761 93.129,29.606 94.297,29.606 95.504,28.399 95.504,27.717 95.711,27.51 96.774,27.51 ; 98.552,27.51 97.663,27.51 ; 96.774,27.51 96.901,27.383 ; 96.774,27.51 97.663,27.51 ; 96.901,27.383 R29.2@97.155,27.129 97.409,27.383 ; 96.901,27.383 97.282,27.383 97.409,27.383 ; 97.409,27.383 97.536,27.51 97.663,27.51
  F.Cu w0.254: R39.1@115.443,60.657 115.57,60.784 115.57,61.252 116.713,62.395 R44.2@116.713,62.816
  F.Cu w0.305: 98.552,27.51 98.908,27.866 v2(99.06,27.866)
  F.Cu w0.406: v2(91.333,66.07) 91.948,66.684 R32.1@91.948,66.753 ; R48.1@116.586,67.007 116.586,66.55 v1(116.891,66.245) 116.713,66.067 R36.1@116.713,65.483
  F.Cu w0.508: R16.2@91.821,28.272 91.821,28.297 92.285,28.761 ; v1(94.488,56.974) 94.894,57.38 99.565,57.38 v3(100.132,57.947) ; U9.2@95.14,77.791 U9.2@95.151,77.802 ; 97.537,77.802 97.874,78.139 110.7,78.139 v1(110.744,78.183) ; R44.2@116.713,62.816 116.713,63.578 v1(116.586,63.705) 116.713,63.832 R31.1@116.713,64.594 R36.1@116.713,65.483
  F.Cu w0.762: 91.948,55.831 v1(92.59,55.831) 92.59,55.189 92.678,55.101 ; 102.657,28.605 102.832,28.605 104.526,26.911 104.526,26.735
  F.Cu w1.016: v2(91.333,66.07) 91.059,65.795 91.059,56.72 91.948,55.831 92.678,55.101 92.678,54.363 94.004,53.037 95.451,53.037 96.266,52.222 v2(96.266,52.021) 96.266,51.505 95.135,50.375 91.729,50.375 EXT1.2@91.44,50.086 ; U9.2@95.14,77.791 96.89,77.791 v2(96.901,77.802) 97.537,77.802 ; v2(98.092,46.413) 98.201,46.413 99.06,47.271 UEXT1.1@99.06,48.388 ; v2(99.06,27.866) 99.065,27.871 99.929,27.871 100.663,28.605 102.657,28.605 ; v2(99.675,32.074) 99.675,33.332 103.124,36.781 v3(105.791,36.781) ; 104.526,26.735 106.127,26.735 L2.2@106.991,25.871 ; L2.2@106.991,24.462 L2.2@106.991,25.871 ; C22.1@107.061,27.002 107.061,25.941 L2.2@106.991,25.871
  B.Cu w0.254: v2(96.266,52.021) 96.52,52.021 R2.1@97.155,52.656 ; RM3.1.2@104.902,56.974 RM3.1.2@105.029,57.101 ; RM3.2.2@105.918,56.72 RM3.2.2@105.918,57.101 ; RM3.3.2@106.68,56.72 RM3.3.2@106.68,57.101
  B.Cu w0.305: L5.1@101.219,57.228 101.346,57.228 102.311,56.263 103.708,56.263 R35.1@104.267,55.704 104.902,56.339 RM3.1.2@104.902,56.974
  B.Cu w0.406: v1(110.744,78.183) 110.744,77.343 116.129,71.958 116.129,70.869 116.891,70.107 v1(116.891,66.245)
  B.Cu w0.508: v1(92.59,55.831) 92.94,56.181 93.733,56.974 v1(94.488,56.974) ; v3(100.132,57.947) 100.851,57.228 L5.1@101.219,57.228 ; RM3.1.2@105.029,57.101 105.029,56.72 105.918,56.72 106.68,56.72 107.569,56.72 RM3.4.2@107.569,57.101 ; R37.1@116.459,63.07 116.459,63.578 v1(116.586,63.705)
  B.Cu w0.61: C10.1@105.664,37.67 105.791,37.543 v3(105.791,36.781) 105.791,35.793 FET3.2@105.727,35.729
  B.Cu w1.016: v2(91.333,66.07) 91.333,69.567 92.329,70.563 95.504,70.563 96.137,71.196 96.137,77.038 96.451,77.352 v2(96.901,77.802) ; v2(96.266,52.021) 96.774,51.513 96.774,47.627 97.988,46.413 v2(98.092,46.413) 98.171,46.334 98.171,46.306 98.933,45.544 98.933,39.219 99.675,38.478 v2(99.675,32.074) 99.06,31.46 v2(99.06,27.866)